# Altium PCB jlinker-isolator.PcbDoc
Units mm, origin at the board's own origin, x right, y up, seen from the top; angles counter-clockwise.
Board outline 56.64 x 25.78 mm, 2 copper layers (Top Layer, Bottom Layer); 21 components, 16 nets, 77 pads, 199 vias.
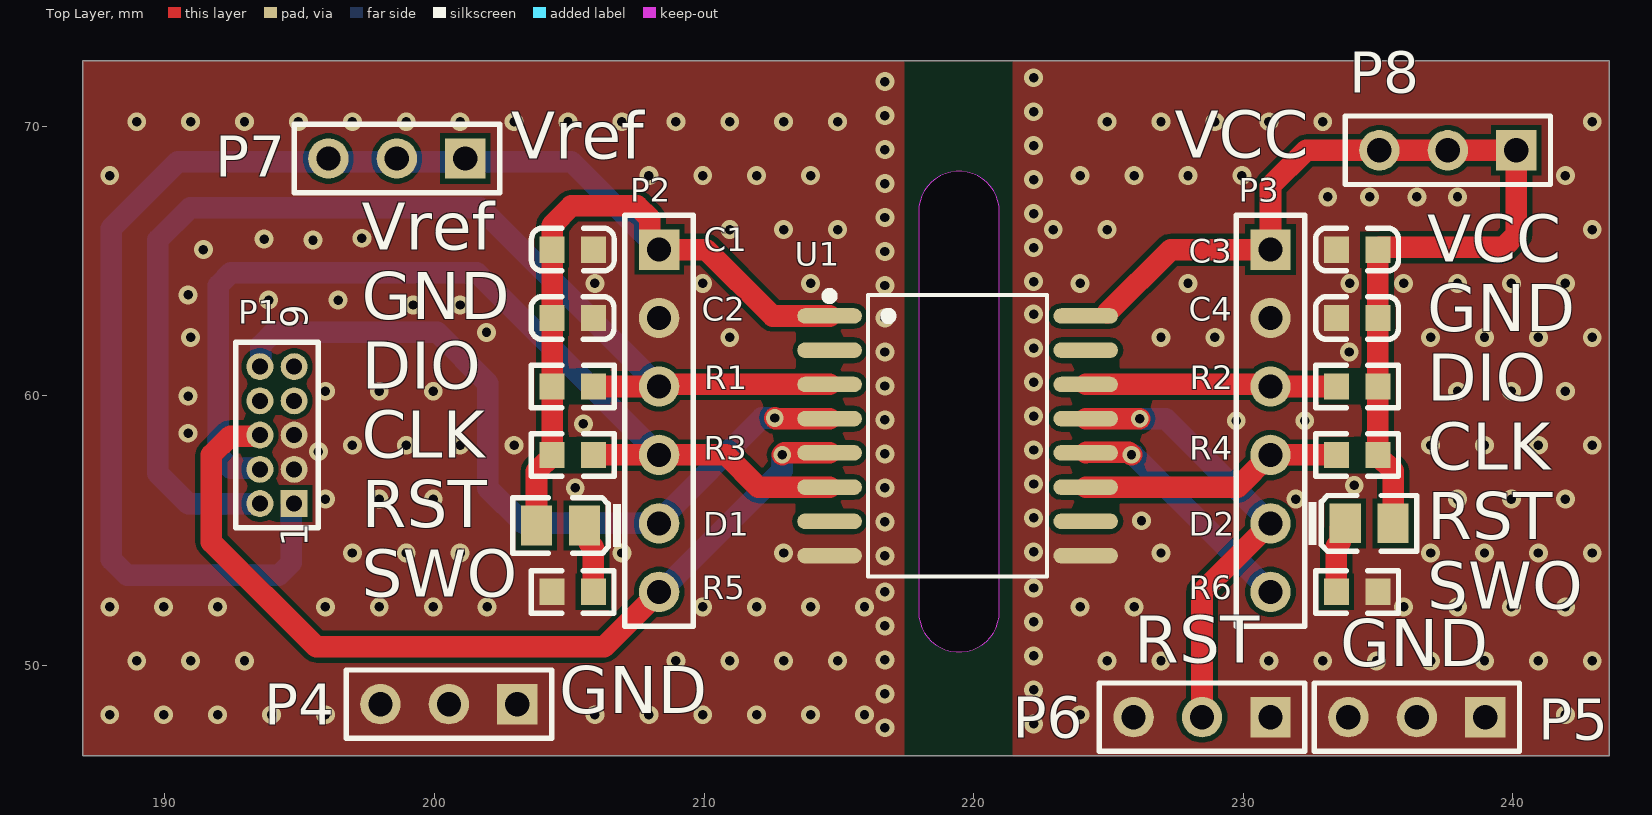
[diagram p0: Top Layer view]
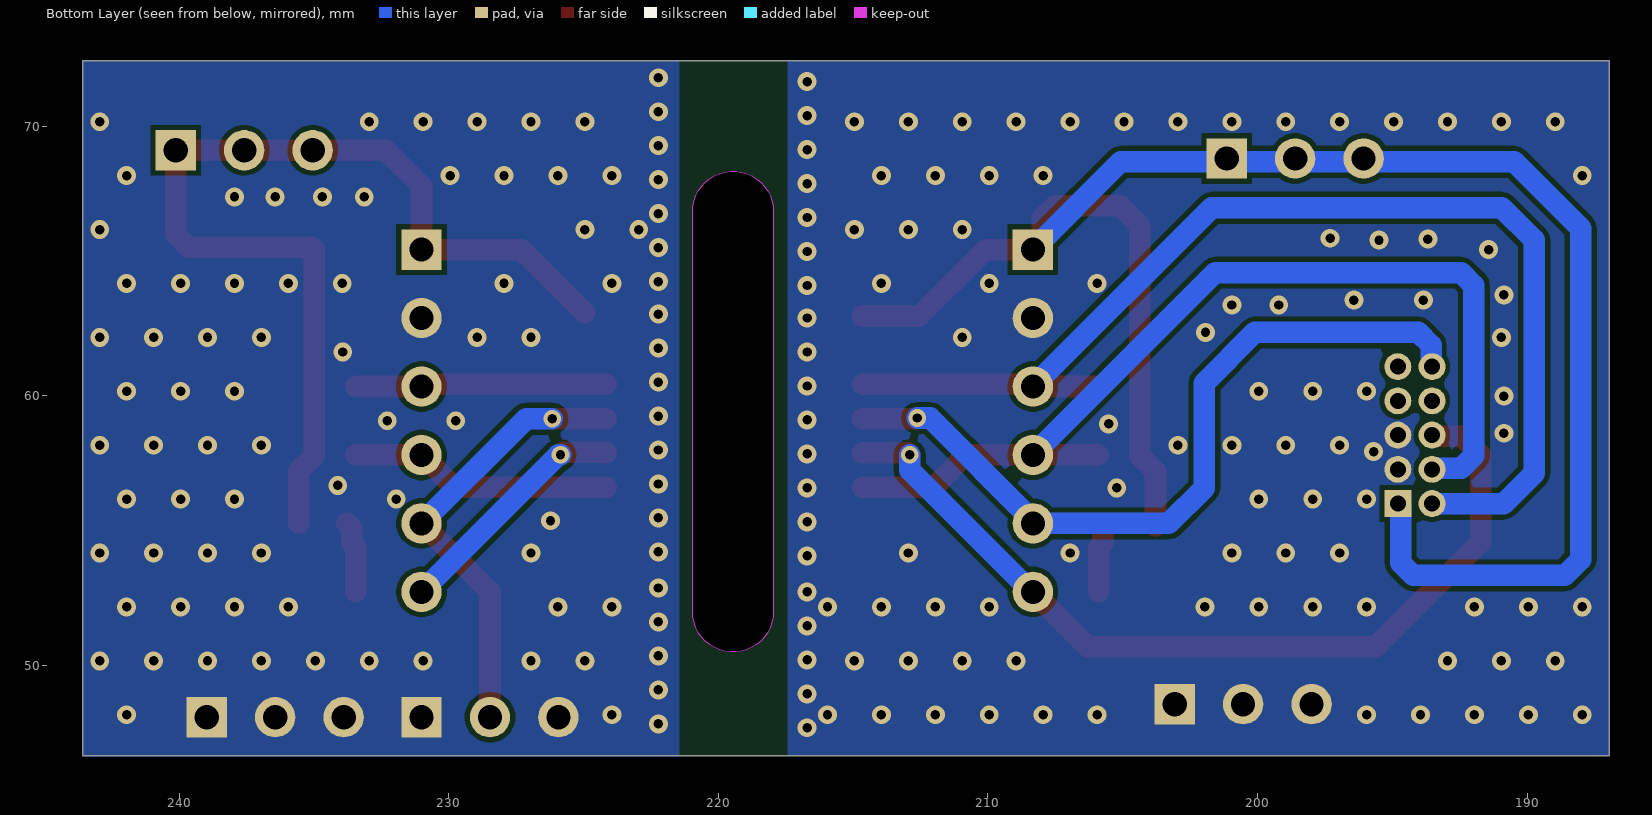
[diagram p1: Bottom Layer view, seen from below]
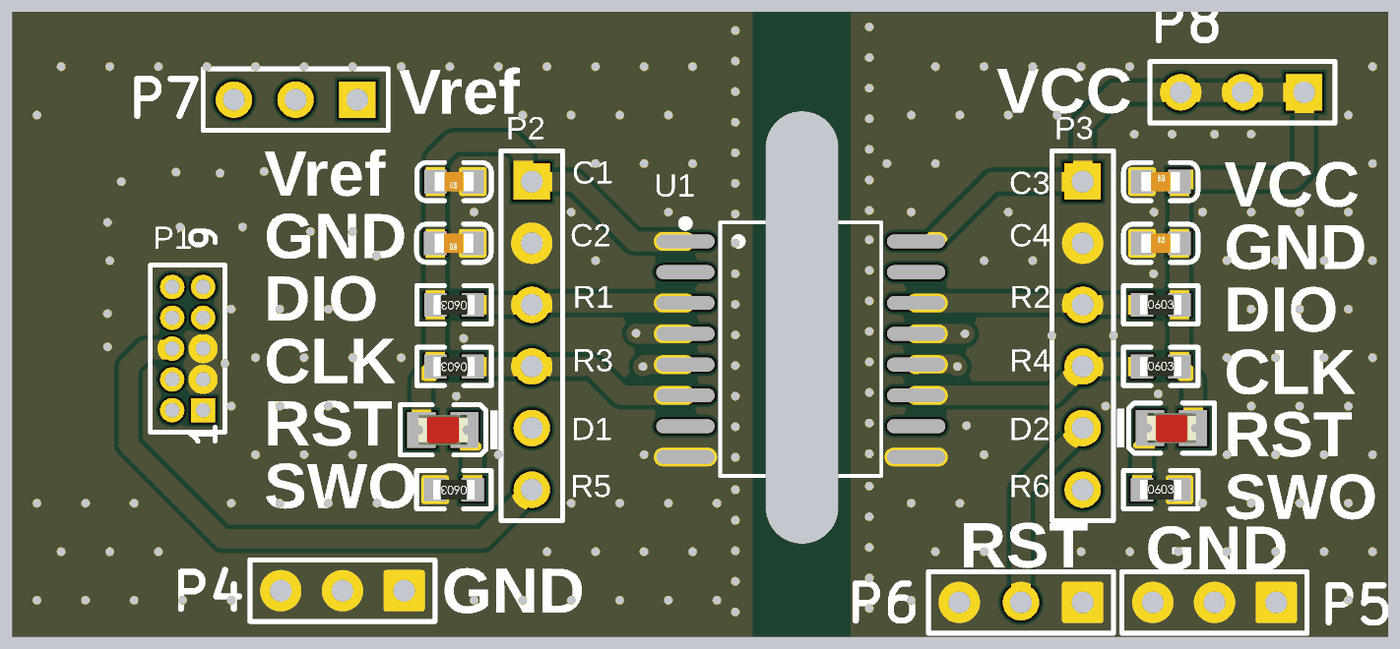
[diagram p2: 3D render of the assembled board from above, using the file's embedded part models]

## Layer stack, top to bottom
Top Solder: solder mask 0.0102, Solder Resist, Dk 3.5
Top Layer: signal copper 0.0356
Dielectric 1: dielectric 0.32, FR-4, Dk 4.8
Bottom Layer: signal copper 0.0356
Bottom Solder: solder mask 0.0102, Solder Resist, Dk 3.5

## Board outline
186.944,46.66 186.944,72.441 243.586,72.441 243.586,46.66
cut-out: 217.956,52 ccw(c219.456,52) 220.956,52 220.956,66.835 ccw(c219.456,66.835) 217.956,66.835

## Design rules (kind name [scope] priority, off if disabled: settings)
Clearance [All] p1: gap=0.18 ignorepadtopadclearanceinfootprint=FALSE
HoleToHoleClearance [All] p1: gap=0 allowstackedmicrovias=TRUE
MinimumSolderMaskSliver [All] p1: minsoldermaskwidth=0
PlaneConnect [All] p1: planeconnectstyle=Direct reliefexpansion=0.508 reliefentries=4 reliefconductorwidth=0.254 reliefairgap=0.254
PolygonConnect [All] p1: connectstyle=Direct reliefconductorwidth=0.254 reliefentries=4 polygonreliefangle="90 Angle" airgapwidth=0.254
RoutingVias [All] p1: holewidth=0.35 width=0.65 viastyle="Through Hole" minholewidth=0.35 minwidth=0.65 maxholewidth=20 maxwidth=20
SilkToSilkClearance [All] p1: silktosilkclearance=0
SilkToSolderMaskClearance [IsPad] p1: minsilkscreentomaskgap=0 clearancetoexposedcopper=TRUE
SolderMaskExpansion [All] p1: expansion=0.102 istentingtop=FALSE
Width [All] p1: maxlimit=10 minlimit=0.254 preferedwidth=0.35
25 further rules are at their usual default settings.

## Components (designator, comment, footprint, x,y, rotation, side; value= is the part's Value field where it differs from the comment)
C1 "100nF" 0603_C 205.13,65.43 r180 top
C2 "100nF" 0603_C 205.122,62.89 r180 top
C3 "100nF" 0603_C 234.227,65.43 r0 top
C4 "100nF" 0603_C 234.227,62.89 r0 top
D1 "翠绿 0805" 0805_LED_S1 204.672,55.194 r180 top
D2 "翠绿 0805" 0805_LED_S1 234.672,55.27 r0 top
P1 "Header 5X2H" MHDR2X5 194.793,56.007 r90 top
P2 "Header 6" HDR1X6 208.331,65.43 r270 top
P3 "Header 6" HDR1X6 231.013,65.43 r270 top
P4 "Header 3" HDR1X3 203.073,48.565 r180 top
P5 "Header 3" HDR1X3 238.982,48.082 r180 top
P6 "Header 3" HDR1X3 231.013,48.082 r180 top
P7 "Header 3" HDR1X3 201.143,68.809 r180 top
P8 "Header 3" HDR1X3 240.132,69.113 r180 top
R1 "1K" 0603_R 205.13,60.35 r180 top
R2 "1K" 0603_R 234.227,60.35 r0 top
R3 "1K" 0603_R 205.13,57.81 r180 top
R4 "1K" 0603_R 234.227,57.81 r0 top
R5 "1K" 0603_R 205.122,52.73 r180 top
R6 "1K" 0603_R 234.227,52.73 r0 top
U1 "SI8605AD-B-IS" si8605 219.405,58.522 r270 top

## Footprints (in the part's own frame and the unit in brackets; to place one, negate y for a bottom-side part, rotate by r counter-clockwise, add the part's x,y. Pads: shape width x height; smd on the part's side, far side on the other; paste and mask are expansions set on the pad)
0603_C [mm]
  rect 0.93x0.98 smd: 1(-0.77,0) 2(0.77,0)
  silkscreen extent -1.53,-0.79 1.54,0.79, body extent -0.8,-0.4 0.8,0.4, height 0.3
0603_R [mm]
  rect 0.93x0.98 smd: 1(-0.77,0) 2(0.77,0)
  silkscreen extent -1.53,-0.79 1.54,0.79, body extent -0.85,-0.4 0.85,0.4, height 0.56
0805_LED_S1 [mm]
  rect 1.16x1.47 smd: A(0.89,0) K(-0.89,0)
  silkscreen extent -2.24,-1.04 1.77,1.03, body extent -1.01,-0.62 1.01,0.62, height 1.1
HDR1X3 [mm] "Connector; Header; 3 Position"
  rect 1.5x1.5 hole 0.9: 1(0,0)
  round 1.5 hole 0.9: 2(2.54,0) 3(5.08,0)
  silkscreen extent -1.27,-1.27 6.35,1.27
HDR1X6 [mm] "Connector; Header; 6 Position"
  rect 1.5x1.5 hole 0.9: 1(0,0)
  round 1.5 hole 0.9: 2(2.54,0) 3(5.08,0) 4(7.62,0) 5(10.16,0) 6(12.7,0)
  silkscreen extent -1.27,-1.27 13.97,1.27
MHDR2X5 [mm] "Connector; Header; 5x2 Position"
  rect 1x1 hole 0.6: 1(0,0)
  round 1 hole 0.6: 2(0,1.27) 3(1.27,0) 4(1.27,1.27) 5(2.54,0) 6(2.54,1.27) 7(3.81,0) 8(3.81,1.27) 9(5.08,0) 10(5.08,1.27)
  silkscreen extent -0.9,-0.9 5.98,2.17
si8605 [mm]
  oval 0.574x2.401 smd: 1(-4.445,-4.75) 2(-3.175,-4.75) 3(-1.905,-4.75) 4(-0.635,-4.75) 5(0.635,-4.75) 6(1.905,-4.75) 7(3.175,-4.75) 8(4.445,-4.75) 9(4.445,4.75) 10(3.175,4.75) 11(1.905,4.75) 12(0.635,4.75) 13(-0.635,4.75) 14(-1.905,4.75) 15(-3.175,4.75) 16(-4.445,4.75)
  silkscreen extent -5.33,-4.9 5.23,3.32

## Part data
C1 C2 C3 C4: library part "0603 100nF (104) 10% 50V", "0603贴片电容", Package=0603, SuppliersPartNumber=C14663, ComponentLink1Description=供应商链接, ComponentLink1URL=http://www.szlcsc.com/product/details_15331.html, Supplier=LC
D1 D2: library part "0805 翠绿", "发光二极管", Package=0805, SuppliersPartNumber=C2297, ComponentLink1Description=供应商链接, ComponentLink1URL=http://www.szlcsc.com/product/details_2670.html, Supplier=LC
P1: "Header, 5-Pin, Dual row, Right Angle", LatestRevisionDate=17-Jul-2002, LatestRevisionNote="Re-released for DXP Platform.", Publisher="Altium Limited"
P2 P3: "Header, 6-Pin", LatestRevisionDate=17-Jul-2002, LatestRevisionNote="Re-released for DXP Platform.", Publisher="Altium Limited"
P4 P5 P6 P7 P8: "Header, 3-Pin", LatestRevisionDate=17-Jul-2002, LatestRevisionNote="Re-released for DXP Platform.", Publisher="Altium Limited"
R1 R2 R3 R4 R5 R6: library part Res2, "0603贴片电阻", LatestRevisionDate=17-Jul-2002, LatestRevisionNote="Re-released for DXP Platform.", PackageDescription="Axial Device, Thru-Hole; 2 Leads; 0.4 in Pin Spacing", PackageReference=AXIAL-0.4, Published=8-Jun-2000, Publisher="Altium Limited"
U1: BOM_JLCPCB Part Class="Extended Part", BOM_Manufacturer="SILICON LABS", BOM_Manufacturer Part=SI8605AD-B-IS, BOM_Supplier=LCSC, BOM_Supplier Part=C430262, Contributor=LCSC, spicePre=U, spiceSymbolName=SI8605AD-B-IS

## Via types
v1: diameter 0.7, hole 0.35, Top Layer to Bottom Layer, tented both sides, 195 vias
v2: diameter 0.65, hole 0.35, Top Layer to Bottom Layer, tented both sides, 4 vias

## Nets (pads, with @x,y where several pads share a name; then routed paths per layer and width w, separated by ;. In a path a pad name is that pad's centre, name@x,y a point inside that pad or via, vN(x,y) a via of type N, cw(c..) or ccw(c..) an arc to the next point about the centre after c; other vN are vias at no path point)
GND: C1.1 C2.1 P1.3 P1.5 P2.2 P4.1 P4.2 P4.3 R5.2 U1.8
  other v1: 216.707,47.689 187.951,48.173 189.951,48.173 191.951,48.173 193.951,48.173 195.951,48.173 205.951,48.173 207.951,48.173 209.951,48.173 211.951,48.173 213.951,48.173 215.951,48.173 216.707,48.949 188.951,50.173 190.951,50.173 192.951,50.173 208.951,50.173 210.951,50.173 212.951,50.173 214.951,50.173 216.707,50.21 216.707,51.47 187.951,52.173 189.951,52.173 191.951,52.173 195.951,52.173 197.951,52.173 199.951,52.173 201.951,52.173 209.951,52.173 211.951,52.173 213.951,52.173 215.951,52.173 216.707,52.73 216.707,54.068 196.951,54.173 198.951,54.173 200.951,54.173 206.951,54.173 212.951,54.173 216.707,55.328 195.951,56.173 197.951,56.173 199.951,56.173 205.219,56.588 216.707,56.588 216.707,57.849 195.693,57.933 196.951,58.173 198.951,58.173 200.951,58.173 202.951,58.173 190.859,58.617 205.522,58.965 216.707,59.109 190.859,59.991 195.951,60.173 197.951,60.173 199.951,60.173 216.707,60.37 216.707,61.63 190.951,62.173 210.951,62.173 201.928,62.357 216.707,62.89 199.212,63.373 200.951,63.373 193.847,63.558 196.422,63.558 190.859,63.748 216.707,64.098 205.951,64.173 209.951,64.173 213.951,64.173 216.707,65.359 191.427,65.43 195.492,65.78 193.675,65.82 197.307,65.849 210.951,66.173 212.951,66.173 214.951,66.173 216.707,66.619 216.707,67.879 187.951,68.173 207.951,68.173 209.951,68.173 211.951,68.173 213.951,68.173 216.707,69.14 188.951,70.173 190.951,70.173 192.951,70.173 194.951,70.173 196.951,70.173 198.951,70.173 200.951,70.173 202.951,70.173 204.951,70.173 206.951,70.173 208.951,70.173 210.951,70.173 212.951,70.173 214.951,70.173 216.707,70.4 216.707,71.66
GND_TARGET: C3.1 C4.1 P3.2 P5.1 P5.2 P5.3 P6.1 P6.3 R6.2 U1.9
  other v1: 222.225,47.834 223.951,48.173 241.951,48.173 222.225,49.095 224.951,50.173 226.951,50.173 230.951,50.173 232.951,50.173 234.951,50.173 236.951,50.173 238.951,50.173 240.951,50.173 242.951,50.173 222.225,50.355 222.225,51.615 223.951,52.173 225.951,52.173 235.951,52.173 237.951,52.173 239.951,52.173 241.951,52.173 222.225,52.876 226.951,54.173 236.951,54.173 238.951,54.173 240.951,54.173 242.951,54.173 222.225,54.213 226.227,55.372 222.225,55.473 231.951,56.173 237.951,56.173 239.951,56.173 241.951,56.173 234.122,56.679 222.225,56.734 222.225,57.994 236.951,58.173 238.951,58.173 240.951,58.173 242.951,58.173 229.743,59.08 232.283,59.08 222.225,59.255 237.951,60.173 239.951,60.173 241.951,60.173 222.225,60.515 233.934,61.63 222.225,61.775 226.951,62.173 228.951,62.173 236.951,62.173 238.951,62.173 240.951,62.173 242.951,62.173 222.225,63.036 223.951,64.173 227.951,64.173 233.951,64.173 235.951,64.173 237.951,64.173 239.951,64.173 241.951,64.173 222.225,64.244 222.225,65.504 222.951,66.173 224.951,66.173 242.951,66.173 222.225,66.764 233.137,67.386 234.693,67.386 236.442,67.386 237.951,67.386 222.225,68.025 223.951,68.173 225.951,68.173 227.951,68.173 229.951,68.173 241.951,68.173 222.225,69.285 224.951,70.173 226.951,70.173 228.951,70.173 230.951,70.173 232.951,70.173 242.951,70.173 222.225,70.545 222.225,71.806
nC: P1.9
NetD1_K: D1.K R5.1 | length 2.6
  Top Layer w0.8: D1.K 205.742,55.014 205.742,54.541 205.892,54.391 R5.1
NetD2_K: D2.K R6.1 | length 2.7
  Top Layer w0.8: R6.1 233.457,54.42 233.602,54.565 233.602,55.09 D2.K
nRESET: P1.10 P2.5 U1.4 | length 29
  Top Layer w0.8: v2(212.623,59.182) 212.649,59.157 U1.4
  Bottom Layer w0.8: P1.10 193.561,61.125 193.561,61.888 194.029,62.357 200.101,62.357 201.981,60.477 201.981,56.578 203.289,55.27 P2.5 208.331,55.372 212.141,59.182 v2(212.623,59.182)
nRESET_TARGET: P3.5 P6.2 U1.13 | length 16.7
  Top Layer w0.8: U1.13 v2(226.162,59.157) ; P6.2 228.473,52.73 P3.5
  Bottom Layer w0.8: v2(226.162,59.157) 227.127,59.157 P3.5
SWCLK: P1.4 P2.4 R3.1 U1.6 | length 36.7
  Top Layer w0.8: R3.1 P2.4 210.82,57.81 212.014,56.617 U1.6
  Bottom Layer w0.8: P1.4 193.484,57.315 192.442,57.315 191.973,57.784 191.973,64.098 192.442,64.567 201.574,64.567 P2.4
SWCLK_TARGET: P3.4 R4.1 U1.11 | length 9.8
  Top Layer w0.8: U1.11 229.794,56.617 230.988,57.81 P3.4 R4.1
SWDIO: P1.2 P2.3 R1.1 U1.3 | length 43.5
  Top Layer w0.8: R1.1 P2.3 208.407,60.427 U1.3
  Bottom Layer w0.8: P1.2 190.859,56.007 189.738,57.128 189.738,65.786 190.932,66.98 201.701,66.98 P2.3
SWDIO_TARGET: P3.3 R2.1 U1.14 | length 9.3
  Top Layer w0.8: U1.14 230.937,60.427 P3.3 R2.1
SWO: P1.6 P2.6 U1.5 | length 33.2
  Top Layer w0.8: P1.6 193.484,58.509 192.42,58.509 191.722,57.81 191.722,54.582 195.606,50.698 206.299,50.698 P2.6 ; v2(212.903,57.81) 212.979,57.887 U1.5
  Bottom Layer w0.8: P2.6 208.382,52.73 212.903,57.252 v2(212.903,57.81)
SWO_TARGET: P3.6 U1.12 | length 9
  Top Layer w0.8: U1.12 224.18,57.911 225.756,57.911 v2(225.857,57.81)
  Bottom Layer w0.8: v2(225.857,57.81) 225.933,57.81 P3.6
TDI: P1.8
VCC_TARGET: C3.2 C4.2 D2.A P3.1 P8.1 P8.2 P8.3 R2.2 R4.2 U1.16 | length 38
  Top Layer w0.8: U1.16@224.956,63.08 227.306,65.43 P3.1 231.013,67.793 232.334,69.113 P8.3 P8.2 P8.1 240.132,65.989 239.663,65.52 235.062,65.52 234.997,65.455 C4.2 R2.2 R4.2 234.997,57.785 235.562,57.22 D2.A
Vref: C1.2 C2.2 D1.A P1.1 P2.1 P7.1 P7.2 P7.3 R1.2 R3.2 U1.1 | length 68.5
  Top Layer w0.8: D1.A 203.782,57.207 204.36,57.785 R3.2 R1.2 C1.2 204.36,66.337 205.08,67.056 207.512,67.056 207.981,66.587 207.981,65.78 P2.1 210.083,65.43 212.547,62.967 U1.1
  Bottom Layer w0.8: P1.1 194.693,55.907 194.693,53.809 194.224,53.34 188.602,53.34 188.011,53.931 188.011,66.22 190.472,68.682 196.063,68.682 198.603,68.682 201.143,68.682 205.08,68.682 P2.1
pads on no net: P1.7 U1.2 U1.7 U1.10 U1.15

## Polygon pours and split planes (outlines as drawn)
GND_TARGET on Top Layer "GND_TARGET_L01_P001" (solid, remove dead copper, pour order 1): 243.586,46.628 243.586,72.409 221.457,72.409 221.457,46.628
GND on Top Layer "GND_L01_P000" (solid, remove dead copper, pour order 0): 217.424,46.66 217.424,72.441 186.944,72.441 186.944,46.66
GND_TARGET on Bottom Layer "GND_TARGET_L02_P003" (solid, remove dead copper, pour order 3): 243.586,46.628 243.586,72.409 221.457,72.409 221.457,46.628
GND on Bottom Layer "GND_L02_P002" (solid, remove dead copper, pour order 2): 217.424,46.66 217.424,72.441 186.944,72.441 186.944,46.66

## Silkscreen, mask and mechanical layers (free items; w line width, h text height)
Top Overlay:
  text "VCC" at 227.464,68.267 h3
  text "Vref" at 202.838,68.229 h3
  text "Vref" at 197.307,64.851 h3
  text "VCC" at 236.837,64.406 h3
  text "GND" at 197.307,62.276 h3
  text "GND" at 236.837,61.828 h3
  text "DIO" at 197.307,59.7 h3
  text "DIO" at 236.837,59.252 h3
  text "CLK" at 197.307,57.128 h3
  text "CLK" at 236.837,56.679 h3
  text "RST" at 197.307,54.552 h3
  text "RST" at 236.837,54.104 h3
  text "SWO" at 197.307,51.976 h3
  text "SWO" at 236.837,51.528 h3
  text "RST" at 225.952,49.532 h3
  text "GND" at 233.602,49.388 h3
  text "GND" at 204.627,47.654 h3
Mechanical 1:
  lines w0.01: 186.944,46.66 186.944,72.441 200.939,72.441 243.586,72.441 243.586,46.66 186.944,46.66
  lines w3: 219.456,52 219.456,66.835

## Text inside footprints (layer, text, board x,y; h text height)
P1: Top Overlay "1" at 195.301,54.407 h1 r90; Top Overlay "9" at 195.301,62.507 h1 r90